# Altium PCB MAKO_pH_sensor_PCB.PcbDoc
Units mm, origin at the board's own origin, x right, y up, seen from the top; angles counter-clockwise.
Board outline 95.5 x 79.5 mm, 2 copper layers (Top Layer, Bottom Layer); 74 components, 53 nets, 199 pads, 175 vias.
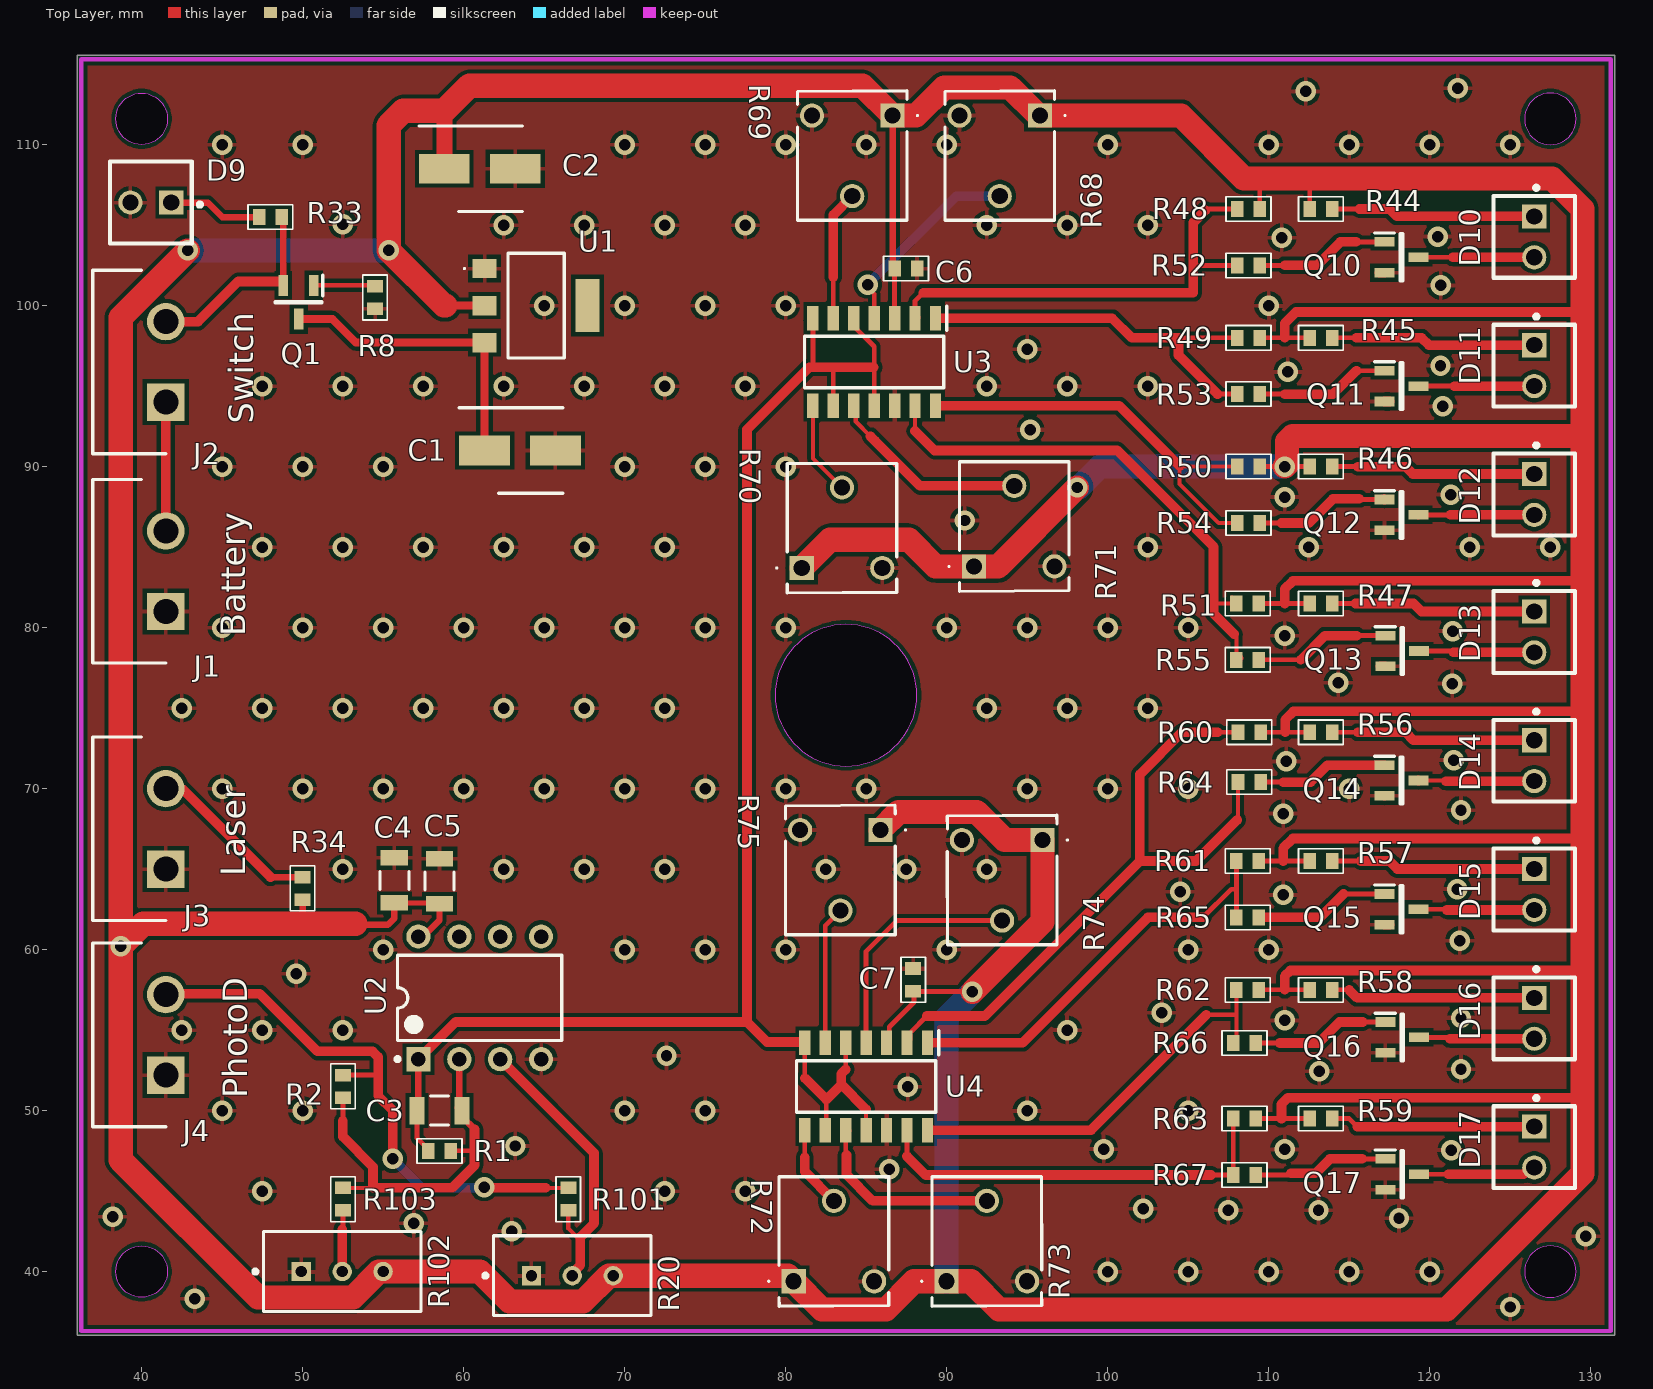
[diagram p0: Top Layer view]
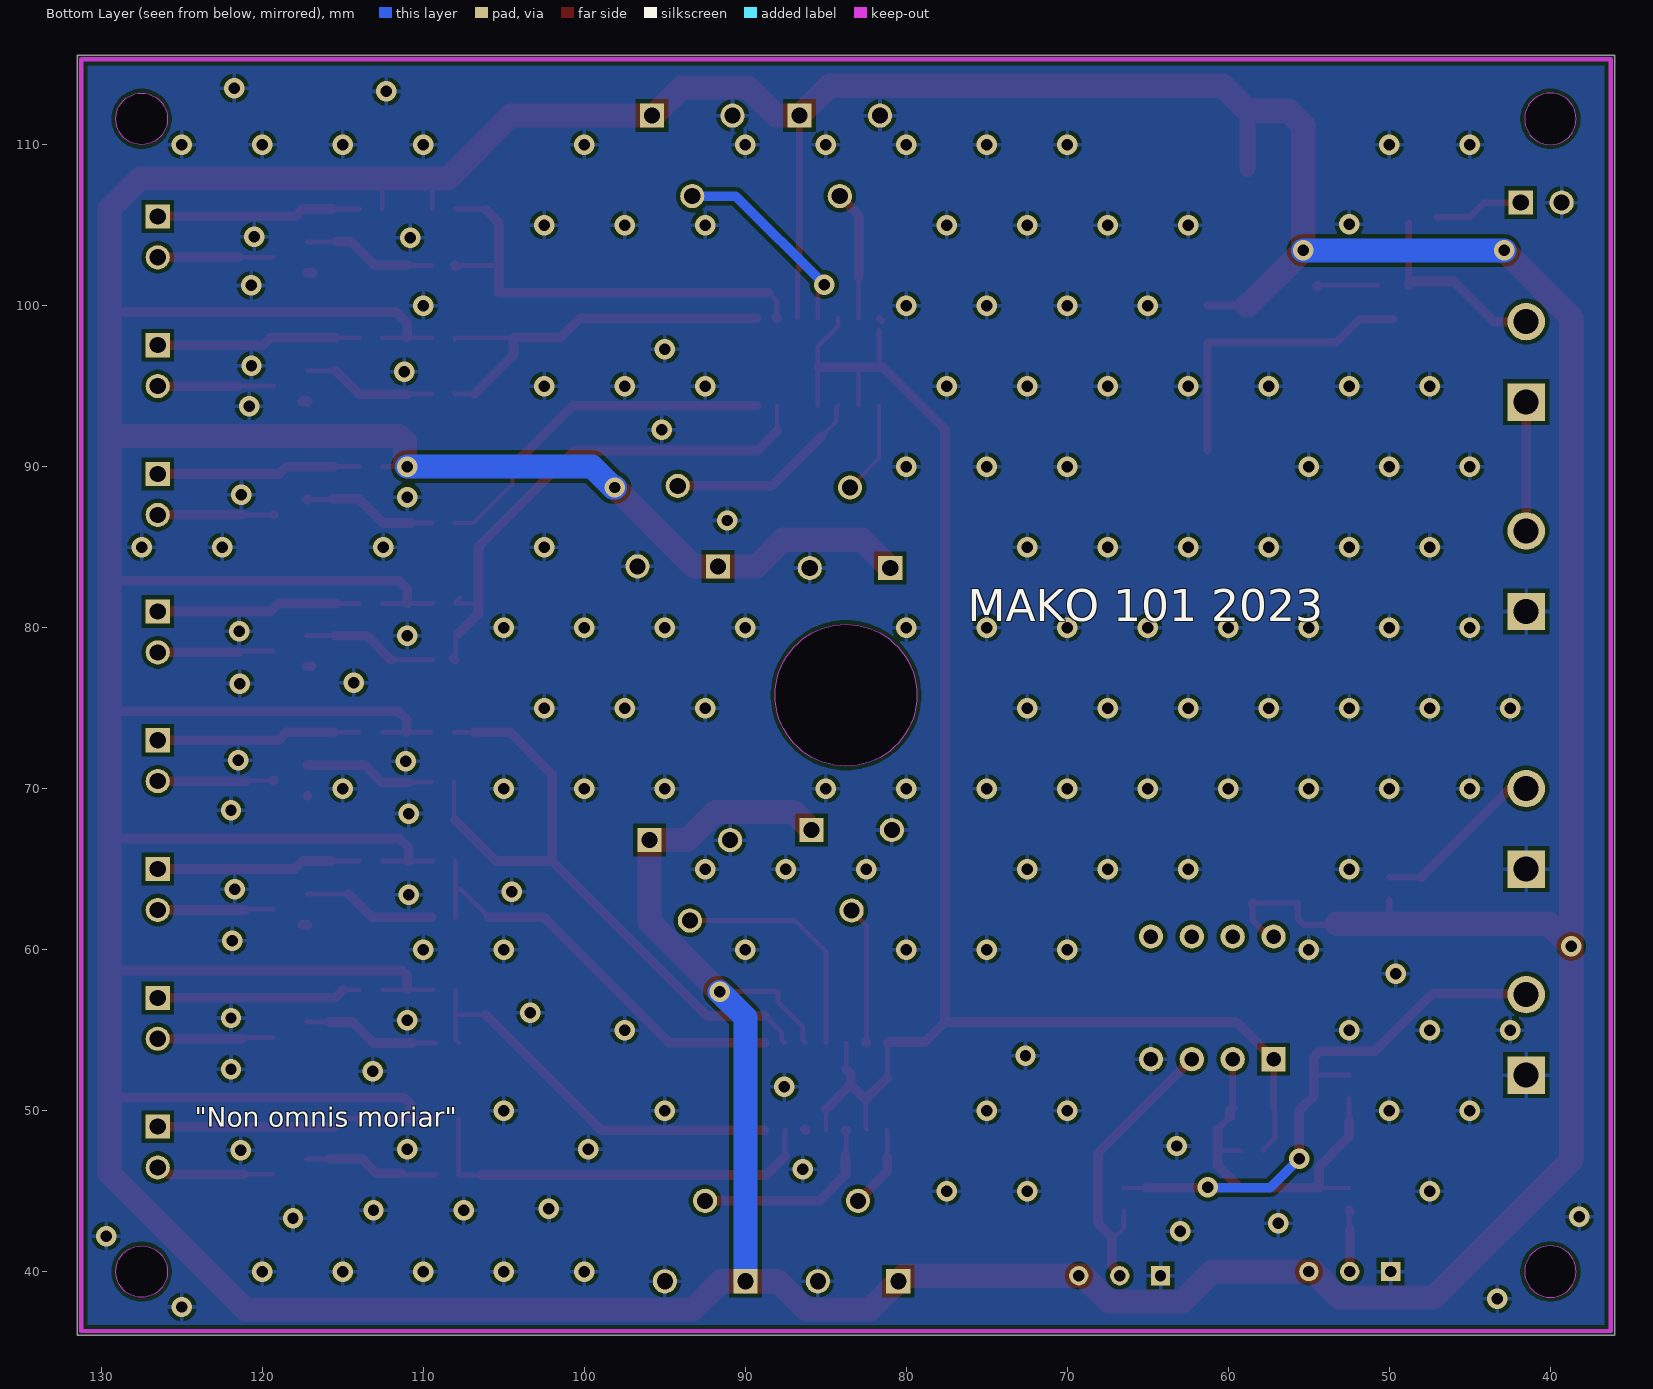
[diagram p1: Bottom Layer view, seen from below]

## Layer stack, top to bottom
Top Solder: solder mask 0.0102, Solder Resist, Dk 3.5
Top Layer: signal copper 0.0356
Dielectric 1: dielectric 0.32, FR-4, Dk 4.8
Bottom Layer: signal copper 0.0356
Bottom Solder: solder mask 0.0102, Solder Resist, Dk 3.5

## Board outline
36,36.05 36,115.55 131.5,115.55 131.5,36.05
cut-out: 125.9,40 ccw(c127.5,40) 127.5,38.4 ccw(c127.5,40) 129.1,40 ccw(c127.5,40) 127.5,41.6 ccw(c127.5,40)
cut-out: 125.9,111.6 ccw(c127.5,111.6) 127.5,110 ccw(c127.5,111.6) 129.1,111.6 ccw(c127.5,111.6) 127.5,113.2 ccw(c127.5,111.6)
cut-out: 79.35,75.8 ccw(c83.75,75.8) 83.75,71.4 ccw(c83.75,75.8) 88.15,75.8 ccw(c83.75,75.8) 83.75,80.2 ccw(c83.75,75.8)
cut-out: 40,38.4 cw(c40,40) 38.4,40 cw(c40,40) 40,41.6 cw(c40,40) 41.6,40 cw(c40,40)
cut-out: 40,110 cw(c40,111.6) 38.4,111.6 cw(c40,111.6) 40,113.2 cw(c40,111.6) 41.6,111.6 cw(c40,111.6)

## Design rules (kind name [scope] priority, off if disabled: settings)
Clearance [All] p1: gap=0.254 ignorepadtopadclearanceinfootprint=FALSE except(0: Arc-Hole Track-Hole SMDPad-Hole THPad-Hole Via-Hole Fill-Hole Poly-Hole Region-Hole Text-Hole)
HoleSize [All] p1: absolutevalues=TRUE maxlimit=2.54 minlimit=0.35 maxpercent=80.000 minpercent=20.000
MinimumAnnularRing [All] p1: minimumring=0.2
PolygonConnect [All] p1: connectstyle=Relief reliefconductorwidth=0.254 reliefentries=4 polygonreliefangle="90 Angle" airgapwidth=0.254
RoutingVias [All] p1: holewidth=0.711 width=1.27 viastyle="Through Hole" minholewidth=0.711 minwidth=1.27 maxholewidth=0.711 maxwidth=1.27
SilkToSilkClearance [All] p1: silktosilkclearance=0.1
SilkToSolderMaskClearance [IsPad] p1: minsilkscreentomaskgap=0.1 clearancetoexposedcopper=TRUE
SolderMaskExpansion [All] p1: expansion=0.102 istentingtop=FALSE
Width [All] p1: maxlimit=1.5 minlimit=0.254 preferedwidth=0.254 minimp=50.000000 maximp=50.000000 favimp=50.000000
27 further rules are at their usual default settings.

## Components (designator, comment, footprint, x,y, rotation, side; value= is the part's Value field where it differs from the comment)
C1 "=Value" CAPAE530X610N 63.5,91 r0 top
C2 "=Value" CAPAE530X610N 61,108.5 r0 top
C3 "C1206C102KGRACTU" FP-C1206C-EF-MFG 58.5,50 r180 top
C4 "C1206C104M5RACTU" FP-C1206C-EB-MFG 55.7,64.3 r90 top value="0.10 μF"
C5 "C1206C104M5RACTU" FP-C1206C-EB-MFG 58.5,64.25 r90 top value="0.10 μF"
C6 "=Value" CAPC1608X90N 87.475,102.3 r180 top
C7 "=Value" CAPC1608X90N 87.925,58.125 r270 top
D9 "=Value" 151033RS03000 41.84,106.4 r180 top
D10 "=Value" 151033RS03000 126.5,105.54 r270 top
D11 "=Value" 151033RS03000 126.5,97.54 r270 top
D12 "=Value" 151033RS03000 126.5,89.54 r270 top
D13 "=Value" 151033RS03000 126.5,81 r270 top
D14 "=Value" 151033RS03000 126.5,73 r270 top
D15 "=Value" 151033RS03000 126.5,65 r270 top
D16 "=Value" 151033RS03000 126.5,57 r270 top
D17 "=Value" 151033RS03000 126.5,49 r270 top
J1 "691101710002" RHDRRA2W95P0X500_1X2_1120X900X1280P 41.5,81 r90 top
J2 "691101710002" RHDRRA2W95P0X500_1X2_1120X900X1280P 41.5,94 r90 top
J3 "691101710002" RHDRRA2W95P0X500_1X2_1120X900X1280P 41.5,65 r90 top
J4 "691101710002" RHDRRA2W95P0X500_1X2_1120X900X1280P 41.5,52.2 r90 top
Q1 "IRLML6402TRPBF" SOT95P237X112-3N 49.75,100.209 r270 top
Q10 "BC847BLT1G" SOT96P237X111-3N 118.25,103 r0 top
Q11 "BC847BLT1G" SOT96P237X111-3N 118.25,95 r0 top
Q12 "BC847BLT1G" SOT96P237X111-3N 118.25,87 r0 top
Q13 "BC847BLT1G" SOT96P237X111-3N 118.3,78.545 r0 top
Q14 "BC847BLT1G" SOT96P237X111-3N 118.25,70.5 r0 top
Q15 "BC847BLT1G" SOT96P237X111-3N 118.25,62.5 r0 top
Q16 "BC847BLT1G" SOT96P237X111-3N 118.3,54.545 r0 top
Q17 "BC847BLT1G" SOT96P237X111-3N 118.3,46.045 r0 top
R1 "*" CAPC1608X90N 58.5,47.5 r180 top
R2 "0" CAPC1608X90N 52.5,51.5 r270 top
R8 "*" CAPC1608X90N 54.5,100.5 r90 top
R20 "3296W-1-103LF" FP-3296W-MFG 66.75,39.75 r270 top
R33 "*" CAPC1608X90N 48,105.5 r180 top
R34 "*" CAPC1608X90N 50,63.8 r90 top
R44 "*" CAPC1608X90N 113.25,106 r0 top
R45 "*" CAPC1608X90N 113.25,98 r0 top
R46 "*" CAPC1608X90N 113.25,90 r0 top
R47 "*" CAPC1608X90N 113.25,81.5 r0 top
R48 "*" CAPC1608X90N 108.75,106 r180 top
R49 "*" CAPC1608X90N 108.75,98 r180 top
R50 "*" CAPC1608X90N 108.75,90 r180 top
R51 "*" CAPC1608X90N 108.7,81.5 r180 top
R52 "*" CAPC1608X90N 108.75,102.5 r180 top
R53 "*" CAPC1608X90N 108.75,94.5 r180 top
R54 "*" CAPC1608X90N 108.75,86.5 r180 top
R55 "*" CAPC1608X90N 108.7,78 r180 top
R56 "*" CAPC1608X90N 113.25,73.5 r0 top
R57 "*" CAPC1608X90N 113.25,65.5 r0 top
R58 "*" CAPC1608X90N 113.25,57.5 r0 top
R59 "*" CAPC1608X90N 113.25,49.5 r0 top
R60 "*" CAPC1608X90N 108.8,73.5 r180 top
R61 "*" CAPC1608X90N 108.7,65.5 r180 top
R62 "*" CAPC1608X90N 108.7,57.5 r180 top
R63 "*" CAPC1608X90N 108.5,49.5 r180 top
R64 "*" CAPC1608X90N 108.8,70.4 r180 top
R65 "*" CAPC1608X90N 108.7,62 r180 top
R66 "*" CAPC1608X90N 108.5,54.2 r180 top
R67 "*" CAPC1608X90N 108.5,46 r180 top
R68 "WH06-2B-10K" 3306F1503 95.8,111.8 r180 top
R69 "WH06-2B-10K" 3306F1503 86.636,111.8 r180 top
R70 "WH06-2B-10K" 3306F1503 81,83.7 r0 top
R71 "WH06-2B-10K" 3306F1503 91.7,83.8 r0 top
R72 "WH06-2B-10K" 3306F1503 80.5,39.396 r0 top
R73 "WH06-2B-10K" 3306F1503 90,39.396 r0 top
R74 "WH06-2B-10K" 3306F1503 95.946,66.8 r180 top
R75 "WH06-2B-10K" 3306F1503 85.9,67.426 r180 top
R101 "DNP" CAPC1608X90N 66.5,44.5 r270 top
R102 "DNP" FP-3296W-MFG 52.46,40.005 r270 top
R103 "DNP" CAPC1608X90N 52.5,44.5 r270 top
U1 "AMS1117-5.0" S402TS1RP 64.5,100 r270 top
U2 "TL072CP" P0008A 61,57 r90 top
U3 "LM2901DT" SOIC127P600X175-14N 85.5,96.5 r270 top
U4 "LM2901DT" SOIC127P600X175-14N 85,51.5 r270 top

## Footprints (in the part's own frame and the unit in brackets; to place one, negate y for a bottom-side part, rotate by r counter-clockwise, add the part's x,y. Pads: shape width x height; smd on the part's side, far side on the other; paste and mask are expansions set on the pad)
3306F1503 [mm]
  rect 1.5x1.5 hole 1: 1(0,0)
  round 1.5 hole 1: 2(2.5,5) 3(5,0)
  silkscreen extent -1.6,-1.55 5.9,6.5
151033RS03000 [mm]
  rect 1.5x1.5 hole 1: 1(0,0)
  round 1.5 hole 1: 2(2.54,0)
  silkscreen extent -1.91,-2.54 3.81,2.54
CAPAE530X610N [mm]
  rect 3.15x1.85 smd: 1(-2.2,0) 2(2.2,0)
  silkscreen extent -3.77,-2.65 2.65,2.65
CAPC1608X90N [mm]
  rect 0.78x0.99 smd: 1(-0.7,0) 2(0.7,0)
  silkscreen extent -1.4,-0.76 1.4,0.76
FP-3296W-MFG [mm]
  rect 1.2x1.2 hole 0.7 paste-2539.97 mask+0: 1(0.005,-2.54)
  round 1.2 hole 0.7 paste-2539.97 mask+0: 2(0.005,0) 3(0.005,2.54)
  silkscreen extent -2.48,-5.52 2.48,4.89, body extent -2.58,-4.99 2.58,4.99, height 0.25
FP-C1206C-EB-MFG [mm]
  rect 0.95x1.7 smd paste+0 mask+0: 1(-1.4,0) 2(1.4,0)
  silkscreen extent -0.55,-0.9 0.55,0.9, body extent -2,-1 2,1, height 0.25
FP-C1206C-EF-MFG [mm]
  rect 0.95x1.7 smd paste+0 mask+0: 1(-1.4,0) 2(1.4,0)
  silkscreen extent -0.55,-0.9 0.55,0.9, body extent -2,-1 2,1, height 0.25
P0008A [mm] "DIP, 8-Leads, Body 10.15x6.6mm, Pitch 2.54mm"
  rect 1.5x1.5 hole 0.9: 1(-3.81,3.81)
  round 1.5 hole 0.9: 2(-3.81,1.27) 3(-3.81,-1.27) 4(-3.81,-3.81) 5(3.81,-3.81) 6(3.81,-1.27) 7(3.81,1.27) 8(3.81,3.81)
  silkscreen extent -3.93,-5.1 2.65,5.23, body extent -3.95,-5.07 3.95,5.07, height 5.08
RHDRRA2W95P0X500_1X2_1120X900X1280P [mm]
  rect 2.325x2.325 / inner round 2.325 / far side rect 2.325x2.325 hole 1.55: 1(0,0)
  round 2.325 hole 1.55: 2(5,0)
  silkscreen extent -3.2,0 8.2,4.54
S402TS1RP [mm]
  rect 1.2x1.5 smd: 1(-2.3,-3.2) 2(0,-3.2) 3(2.3,-3.2)
  rect 3.3x1.5 smd: 4(0,3.2)
  silkscreen extent -3.25,-4.5 3.25,1.75
SOIC127P600X175-14N [mm]
  rect 1.525x0.7 smd: 1(-2.712,3.81) 2(-2.712,2.54) 3(-2.712,1.27) 4(-2.712,0) 5(-2.712,-1.27) 6(-2.712,-2.54) 7(-2.712,-3.81) 8(2.712,-3.81) 9(2.712,-2.54) 10(2.712,-1.27) 11(2.712,0) 12(2.712,1.27) 13(2.712,2.54) 14(2.712,3.81)
  silkscreen extent -3.47,-4.33 1.6,4.51
SOT95P237X112-3N [mm]
  rect 1.3x0.6 smd: 1(-1.05,0.95) 2(-1.05,-0.95) 3(1.05,0)
  silkscreen extent -1.7,-1.46 0.05,1.5
SOT96P237X111-3N [mm]
  rect 1.25x0.6 smd: 1(-1.05,0.955) 2(-1.05,-0.955) 3(1.05,0)
  silkscreen extent -1.68,-1.46 0.08,1.51

## Part data
C1 C2: library part CapPol, "Ceramic capacitor"
C3: library part CMP-03020-034681-1, "CAP CER 1000PF 2KV X7R 1206", Capacitance=1nF, Case Code (Imperial)=1206, Case Code (Metric)=3216, Dielectric=X7R, Dielectric Material=Ceramic, Max Operating Temperature=125°C, Min Operating Temperature=-55°C, Package Quantity=1, Tolerance=10%, Voltage=2kV, Voltage Rating (DC)=2.5kV, Case/Package=1206, Construction=Flat, Depth=1.6mm, Dissipation Factor=2.5%, Height=1.6mm, Length=3.2mm, Mount="Surface Mount", Number of Pins=2, Packaging="Tape and Reel", Radiation Hardening=No, REACH SVHC="No SVHC", RoHS Compliant=Yes, Series=C, Termination=SMD/SMT, Thickness=0.069inch, Voltage Rating=2kV, Width=0.063inch
C4 C5: library part CMP-03020-028488-1, "CAP CER 0.1UF 50V X7R 1206", Capacitance="0.10 μF", Manufacturer=KEMET, Package=C1206C-EB, Temperature="-55°C to +150°C", Temperature Characteristic=X7R, Temperature Coefficient=15%, Temperature Range High=+150°C, Temperature Range Low=-55°C, Tolerance=0.2, Voltage Rating="50 V", Automotive=Yes, Automotive Grade="Grade 0", Category=Cap, ComponentLink2Description=Datasheet, ComponentLink2URL=https://content.kemet.com/datasheets/KEM_C1007_X8R_ULTRA_150C_SMD.pdf, Device Class L1="Passive Components", Device Class L2=Capacitors, Device Class L3="Ceramic Capacitors", Digikey Description="CAP CER 0.1UF 50V X7R 1206", Height=0.88mm, Ipc Land Pattern Name=CAPC320160X78, Lead Free=Yes, Manufacturer Part Number=C1206C104M5RACTU, Material=Ceramic, Mouser Description="Multilayer Ceramic Capacitors MLCC - SMD/SMT 50volts 0.1uF X7R 20%", Octopart=https://octopart.com/c1206c104m5ractu-kemet-129344, RoHS=TRUE
C6 C7: library part Cap, "Ceramic capacitor"
D9 D10 D11 D12 D13 D14 D15 D16 D17: library part LED
J1 J2 J3 J4: "WR-TBL Series 101 Horizontal Entry Modular, THT, pitch 5mm, 2p", Manufacturer="Wurth Elektronik", Operating Temperature Max=105°C, Operating Temperature Min=-40°C, Rated Current=16A, Working Voltage=250V, Application="Pressure Clamp", Category="Terminal Blocks", ComponentLink1Description="Website Link", ComponentLink1URL=https://www.we-online.com/redexpert/article/691101710002?ad, ComponentLink2Description="Datasheet Link", ComponentLink2URL=https://www.we-online.com/redexpert/spec/691101710002?ad, Manufacturer Part Number=691101710002, Match Code=WR-TBL, Modularity=Yes, Mount="Through Hole", Number of Pins=2, Number of Rows=1, Orientation=Horizontal, Packaging=Box, Pitch=5mm
Q1: library part PMOSFET
Q10 Q11 Q12 Q13 Q14 Q15 Q16 Q17: "Transistor NPN 45V 100mA hfe200 SOT23 ON Semi BC847BLT1G NPN Bipolar Transistor, 0.1 A, 45 V, 3-Pin SOT-23", Manufacturer_Name=onsemi, Mouser Part Number=863-BC847BLT1G, Datasheet Link=http://www.onsemi.com/pub/Collateral/BC846ALT1-D.PDF, Geometry.Height=1.11mm, Manufacturer_Part_Number=BC847BLT1G, Mouser Price/Stock=https://www.mouser.co.uk/ProductDetail/onsemi/BC847BLT1G?qs=vNc2DXHODiLAH81QlkcRzw%3D%3D
R1 R2 R8 R33 R34 R44 R45 R46 R47 R48 R49 R50 R51 R52 R53 R54 R55 R56 R57 R58 R59 R60 R61 R62 R63 R64 R65 R66 R67 R101 R103: library part RES, "Resistor"
R20 R102: library part CMP-1747-00001-8, "TRIMMER 10K OHM 0.5W PC PIN TOP / 3296W-1-103LF", Color=Blue, Insulation Resistance=1GR, Max Operating Temperature=125°C, Max Power Dissipation=500mW, Min Operating Temperature=-55°C, Package Quantity=50, Resistance=10kR, Resistance Tolerance=10%, Resistor Type=Cermet, Temperature Coefficient=100ppm/°C, Contact Plating=Tin, Depth=4.83mm, Height=11.55mm, Lead Free="Lead Free", Length=9.53mm, Military Standard=Not, Mount="Through Hole", Number of Turns=25, Packaging=Rail/Tube, Power Rating=500mW, Radiation Hardening=No, Reach SVHC Compliant=Yes, RoHS Compliant=Yes, Series=3296, Taper=Linear, Technology=CERMET, Termination=Pin, Tolerance=10%, Weight=0.03oz, Width=9.53mm
R68 R69 R70 R71 R72 R73 R74 R75: library part 3306F-1-103, "10 kOhms 0.2W, 1/5W PC Pins Through Hole Trimmer Potentiometer Cermet 1 Turn Top Adjustment", Package="6432 Bourns", Availability=Unavailable, MF=Bourns, MP=3306F-1-103, Price=None, SnapEDA_Link=https://www.snapeda.com/parts/3306F-1-103/Bourns/view-part/293813/?ref=snap
U1: "1A LOW DROPOUT VOLTAGE REGULATOR", Package="SOT-223 Seeed Technology", Availability="Not in stock", Check_prices=https://www.snapeda.com/parts/AMS1117-5.0/ams/view-part/?ref=eda, MF=ams, MP=AMS1117-5.0, Price=None, SnapEDA_Link=https://www.snapeda.com/parts/AMS1117-5.0/ams/view-part/?ref=snap
U2: library part CMP-0017-00950-2, "Dual Low-Noise JFET-Input General-Purpose Operational Amplifier, 7 to 36 V, 0 to 70 degC, 8-pin DIP (P8), Pb-Free (RoHS)", Manufacturer="Texas Instruments", Rating=Catalog, Total Supply Voltage(Max)(+5V is 5, +/-5V is 10)=36, Total Supply Voltage(Min)(+5V is 5, +/-5V is 10)=7, CMRR(Min)(dB)=70, Code_JEDEC=MS-001, ComponentLink1Description="Manufacturer URL", ComponentLink1URL=http://www.ti.com/, ComponentLink2Description=Datasheet, ComponentLink2URL=http://www.ti.com/lit/ds/symlink/tl072.pdf, ComponentLink3Description="Package Specification", ComponentLink3URL=http://www.ti.com/litv/pdf/mpdi001b, DatasheetVersion=SLOS080J, Eco-Plan="Pb-Free (RoHS)", GBW(Typ)(MHz)=3, IIB(Max)(pA)=200, Iq per channel(Max)(mA)=2.5, Mounting Technology="Through Hole", Number of Channels=2, Offset Drift(Typ)(uV/C)=18, PackageDescription="8-Pin Plastic In-Line, Body 9.59 x 6.35 mm, Pitch 2.54 mm", PackageReference=P0008A, PackageVersion="4040082/E, 04/2010", PartNumber=TL072CP, Slew Rate(Typ)(V/us)=13, Sub Family="General Purpose Amplifier, High Supply Voltage Amplifier (>=30V)", Vio (25C)(Max)(mV)=10, Vn at 1kHz(Typ)(nV/rtHz)=18
U3 U4: "LM2901DT, Quad Comparator Open Collector 1.3us 12 V, 15 V, 18 V, 24 V, 28 V, 3 V, 5 V, 9 V 14-Pin SO", Manufacturer_Name=STMicroelectronics, Mouser Part Number=511-LM2901DT, Datasheet Link=http://www.st.com/st-web-ui/static/active/en/resource/technical/document/datasheet/CD00000532.pdf, Geometry.Height=1.75mm, Manufacturer_Part_Number=LM2901DT, Mouser Price/Stock=https://www.mouser.co.uk/ProductDetail/STMicroelectronics/LM2901DT?qs=dKKAVK9nnHN1RlpYJ88XIQ%3D%3D

## Via types
v1: diameter 1.27, hole 0.711, Top Layer to Bottom Layer, 175 vias

## Nets (pads, with @x,y where several pads share a name; then routed paths per layer and width w, separated by ;. In a path a pad name is that pad's centre, name@x,y a point inside that pad or via, vN(x,y) a via of type N, cw(c..) or ccw(c..) an arc to the next point about the centre after c; other vN are vias at no path point)
+5V: C2.1 C4.1 C5.1 C6.2 C7.2 R20.3 R34.1 R44.1 R45.1 R46.1 R47.1 R48.1 R49.1 R50.1 R51.1 R56.1 R57.1 R58.1 R59.1 R60.1 R61.1 R62.1 R63.1 R68.1 R69.1 R70.1 R71.1 R72.1 R73.1 R74.1 R75.1 R102.3 U1.2 U2.8 U3.3 U4.3 | length 616.3
  Top Layer w0.254: 53.275,61.6 53.325,61.55 ; C7.2@87.975,57.375 C7.2@88,57.4 ; 109.45,107.85 109.5,107.9 ; 112.5,107.9 112.55,107.85
  Top Layer w0.3: C4.1 C5.1@58.45,62.9 ; U4.3 86.44,54.382 86.44,55.19 87.975,56.725 C7.2@87.975,57.375 ; U3.3 C6.2@86.77,102.2 ; C7.2@88,57.4 v1@91.575,57.4 ; R63.1 110.8,49.5 R59.1 ; R62.1 111,57.5 R58.1 ; R61.1 110.9,65.5 R57.1 ; R51.1 111,81.5 R47.1 ; R50.1 v1(111,90) R46.1 ; R49.1 111,98 R45.1 ; R48.1 109.45,107.85 ; R60.1 111.025,73.5 R56.1 ; R44.1 112.55,107.85
  Top Layer w0.4: 50,61.6 R34.1 ; 53.325,61.55 55.3,61.55 55.7,61.95 C4.1 ; U2.8@57.485,60.81 57.488,60.81 58.5,61.822 C5.1 ; C6.2@86.664,102.3 R69.1@86.664,111.771
  Top Layer w0.5: U2.8 U2.8@57.461,60.81 ; 58.879,100 U1.2
  Top Layer w0.6: C5.1@58.45,62.9 C5.1 ; R69.1 R69.1@86.664,111.771 ; v1@91.575,57.4 v1(91.6,57.375) ; 110.8,49.5 110.8,50.4 111.2,50.8 129.5,50.8 ; 110.9,65.5 110.9,66.3 111.5,66.9 129.3,66.9 129.5,66.7 ; 111,57.5 111,58.349 111.351,58.7 129.4,58.7 129.5,58.8 ; 111,81.5 111,82.4 111.5,82.9 129.3,82.9 129.5,82.7 ; 111,98 111,98.9 111.7,99.6 129.2,99.6 129.5,99.3 ; 111.025,73.5 111.025,74.275 111.55,74.8 129.5,74.8
  Top Layer w1: C2.1 58.8,112.1
  Top Layer w1.5: v1(42.861,103.425) 38.7,99.264 v1(38.7,60.2) ; 53.275,61.6 50,61.6 40.1,61.6 v1(38.7,60.2) ; 58.879,100 58.775,100 v1(55.35,103.425) 55.35,111.196 56.254,112.1 58.8,112.1 60.354,113.654 84.782,113.654 R69.1 88.1,111.8 89.854,113.554 93.946,113.554 95.7,111.8 R68.1 104.555,111.8 108.455,107.9 109.5,107.9 112.5,107.9 127.6,107.9 129.5,106 129.5,99.3 129.5,91.9 ; R70.1 82.754,85.454 87.66,85.454 89.314,83.8 R71.1 93.2,83.8 v1(98.1,88.7) ; R75.1 87.028,68.554 91.86,68.554 93.614,66.8 R74.1@95.6,66.8 ; v1(91.6,57.375) 95.946,61.721 R74.1 ; v1(111,90) 111.149,90.149 111.149,91.549 111.5,91.9 129.5,91.9 ; v1(38.7,60.2) 38.7,46.92 47.22,38.4 48.9,38.4 48.904,38.396 53.124,38.396 54.728,40 R102.3 61,40 62.859,38.141 67.414,38.141 69.018,39.745 R20.3 80.151,39.745 R72.1 82.254,37.642 86.227,37.642 87.981,39.396 R73.1 91.504,39.396 93.258,37.642 121.042,37.642 129.5,46.1 129.5,50.8 129.5,58.8 129.5,66.7 129.5,74.8 129.5,82.7 129.5,91.9
  Bottom Layer w0.6: R69.1@86.5,111.9 R69.1@86.772,111.628
  Bottom Layer w1.5: v1(42.861,103.425) v1(55.35,103.425) ; R73.1 90,55.775 v1(91.6,57.375) ; v1(98.1,88.7) 98.219,88.7 99.519,90 v1(111,90)
GND: C1.2 C2.2 C4.2 C5.2 C6.1 C7.1 D9.2 J1.1 J3.1 J4.1 Q10.2 Q11.2 Q12.2 Q13.2 Q14.2 Q15.2 Q16.2 Q17.2 R8.1 R20.1 R68.3 R69.3 R70.3 R71.3 R72.3 R73.3 R74.3 R75.3 R102.1 U1.1 U2.4 U3.12 U4.12 | length 1.4
  Top Layer w0.6: R102.1@49.91,40.01 R102.1 ; U4.12 U4.12@86.32,48.838 ; Q10.2@116.875,102.045 Q10.2 ; Q13.2@116.925,77.59 Q13.2 ; Q15.2 Q15.2@117.525,61.545 ; Q11.2 Q11.2@117.525,94.045
  other v1: 125,37.8 43.3,38.3 100,40 105,40 110,40 115,40 120,40 129.7,42.2 63,42.5 56.9,43 118.1,43.3 38.2,43.4 107.5,43.8 113.1,43.8 102.2,43.9 47.5,45 72.5,45 77.5,45 86.425,46.35 121.35,47.525 99.75,47.6 111,47.6 63.2,47.8 45,50 50,50 70,50 75,50 95,50 105,50 87.575,51.475 113.15,52.45 121.95,52.575 72.6,53.4 42.5,55 47.5,55 52.5,55 97.5,55 111,55.6 121.95,55.75 103.35,56.075 49.6,58.5 55,60 70,60 75,60 80,60 90,60 105,60 110,60 121.875,60.55 110.9,63.4 104.5,63.6 121.725,63.75 52.5,65 62.5,65 67.5,65 72.5,65 82.5,65 87.5,65 92.5,65 110.9,68.45 121.95,68.65 45,70 50,70 55,70 60,70 65,70 70,70 75,70 80,70 85,70 95,70 100,70 105,70 115,70 111.1,71.7 121.5,71.75 42.5,75 47.5,75 52.5,75 57.5,75 62.5,75 67.5,75 72.5,75 92.5,75 97.5,75 102.5,75 121.4,76.525 114.325,76.575 111,79.5 121.45,79.775 45,80 50,80 55,80 60,80 65,80 70,80 75,80 80,80 90,80 95,80 100,80 105,80 47.5,85 52.5,85 57.5,85 62.5,85 67.5,85 72.5,85 102.5,85 112.5,85 122.5,85 127.5,85 91.125,86.65 111,88.1 121.3,88.25 45,90 50,90 55,90 70,90 75,90 80,90 95.2,92.3 120.825,93.75 47.5,95 52.5,95 57.5,95 62.5,95 67.5,95 72.5,95 77.5,95 92.5,95 97.5,95 102.5,95 111.2,95.9 120.675,96.275 95,97.3 65,100 70,100 75,100 80,100 110,100 120.7,101.25 110.825,104.225 120.5,104.275 62.5,105 67.5,105 72.5,105 77.5,105 92.5,105 97.5,105 102.5,105 52.5,105.064 45,110 50,110 70,110 75,110 80,110 85,110 90,110 100,110 110,110 115,110 120,110 125,110 112.3,113.3 121.75,113.5
NetC1_1: C1.1 Q1.3 U1.3 | length 18.9
  Top Layer w0.5: Q1.3 51.841,99.159 53.3,97.7 U1.3 C1.1
NetC3_1: C3.1 R1.1 R2.2 R103.1 U2.2 | length 23.6
  Top Layer w0.254: R103.1 54.375,45.2 ; 60.65,47.5 60.675,47.475
  Top Layer w0.3: 52.5,49.375 R2.2 ; R1.1 60.65,47.5
  Top Layer w0.4: C3.1@59.73,50.17 U2.2 ; C3.1@59.9,49.625 60.675,48.85
  Top Layer w0.6: 52.5,49.375 52.5,48.375 54.375,46.5 54.375,45.2 59.275,45.2 60.675,46.6 60.675,47.475 60.675,48.85 ; C3.1@59.73,50.17 C3.1 C3.1@59.9,49.625
NetC3_2: C3.2 R1.2 U2.1 U3.5 U3.7 U3.9 U3.11 U4.5 U4.7 U4.9 U4.11 | length 101.9
  Top Layer w0.254: R1.2 R1.2@57.8,47.605 ; U4.9 U4.9@82.525,48.853 ; 82.96,96.11 83.025,96.175 ; U4.11 85,50.08
  Top Layer w0.3: C3.2 57.1,48.305 R1.2@57.8,47.605 ; 81.19,52.01 U4.7 ; 81.7,96.175 U3.7@81.7,98.46 ; U4.9@82.525,48.853 82.525,50.675 ; U3.9 82.96,96.11 ; 83.73,52.555 U4.5 ; U3.5 84.23,98.727 85.5,97.457 85.5,96.2 85.5,95.475 U3.11
  Top Layer w0.4: C3.2@57.19,50.19 U2.1 ; U3.7@81.54,99.062 U3.7
  Top Layer w0.6: U2.1 59.5,55.5 77.6,55.5 ; 81.19,52.01 82.525,50.675 83.465,51.615 ; U4.7 81.184,54.212 81.14,54.256 78.844,54.256 77.6,55.5 ; 83.73,52.555 83.465,52.29 83.465,51.615 ; 85,50.08 83.465,51.615 ; 85.475,96.175 83.025,96.175 81.7,96.175 81.475,96.175 77.6,92.3 77.6,55.5
NetD9_1: D9.1 R33.2 | length 5.6
  Top Layer w0.4: D9.1 44.1,106.4 45,105.5 R33.2@47.05,105.5
NetD10_1: D10.1 R44.2 | length 12.7
  Top Layer w0.3: R44.2 115.65,106
  Top Layer w0.6: 115.65,106 117.5,106 117.96,105.54 D10.1
NetD10_2: D10.2 Q10.3 | length 7.2
  Top Layer w0.3: Q10.3 121.45,103
  Top Layer w0.6: 121.45,103 D10.2
NetD11_1: D11.1 R45.2 | length 12.7
  Top Layer w0.3: R45.2 115.45,98
  Top Layer w0.6: 115.45,98 119.5,98 119.96,97.54 D11.1
NetD11_2: D11.2 Q11.3 | length 7.2
  Top Layer w0.3: Q11.3 121.525,95
  Top Layer w0.6: 121.525,95 D11.2
NetD12_1: D12.1 R46.2 | length 12.7
  Top Layer w0.3: R46.2 115.55,90
  Top Layer w0.6: 115.55,90 118.5,90 118.96,89.54 D12.1
NetD12_2: D12.2 Q12.3 | length 7.2
  Top Layer w0.3: Q12.3 121.275,87
  Top Layer w0.6: 121.275,87 D12.2
NetD13_1: D13.1 R47.2 | length 12.8
  Top Layer w0.3: R47.2 115.4,81.5
  Top Layer w0.6: 115.4,81.5 119,81.5 119.5,81 D13.1
NetD13_2: D13.2 Q13.3 | length 7.2
  Top Layer w0.254: 121.38,78.545 121.465,78.46
  Top Layer w0.3: Q13.3 121.38,78.545
  Top Layer w0.6: 121.465,78.46 D13.2 D13.2@126.458,78.502
NetD14_1: D14.1 R56.2 | length 12.8
  Top Layer w0.254: R56.2 115.55,73.5
  Top Layer w0.6: 115.55,73.5 118.5,73.5 119,73 D14.1
NetD14_2: D14.2 Q14.3 | length 7.3
  Top Layer w0.254: Q14.3 120.975,70.5 121.015,70.46
  Top Layer w0.6: Q14.3 Q14.3@119.32,70.48 ; 121.015,70.46 D14.2 D14.2@126.48,70.48
NetD15_1: D15.1 R57.2 | length 12.8
  Top Layer w0.3: R57.2 115.725,65.5
  Top Layer w0.6: 115.725,65.5 117.5,65.5 118,65 D15.1
NetD15_2: D15.2 Q15.3 | length 7.2
  Top Layer w0.254: 121.025,62.5 121.065,62.46
  Top Layer w0.3: Q15.3 121.025,62.5
  Top Layer w0.6: 121.065,62.46 D15.2 D15.2@126.48,62.48
NetD16_1: D16.1 R58.2 | length 12.8
  Top Layer w0.3: R58.2 115,57.5
  Top Layer w0.6: 115,57.5 115.5,57 D16.1
NetD16_2: D16.2 Q16.3 | length 7.2
  Top Layer w0.254: 121.18,54.545 121.265,54.46
  Top Layer w0.3: Q16.3 121.18,54.545
  Top Layer w0.6: 121.265,54.46 D16.2 D16.2@126.457,54.503
NetD17_1: D17.1 R59.2 | length 12.9
  Top Layer w0.3: R59.2 115,49.5 115.5,49
  Top Layer w0.6: R59.2@113.95,49.395 R59.2 ; 115.5,49 116,49 D17.1
NetD17_2: D17.2 Q17.3 | length 7.3
  Top Layer w0.3: Q17.3 121.17,46.045
  Top Layer w0.6: 121.17,46.045 125.841,46.045 126.256,46.46 D17.2
NetJ1_2: J1.2 J2.1 | length 8
  Top Layer w0.6: J1.2 J2.1
NetJ2_2: J2.2 Q1.2 R33.1 | length 12.3
  Top Layer w0.4: Q1.2@48.8,101.327 R33.1@48.8,105.15
  Top Layer w0.6: J2.2 43.5,99 46,101.5 48.627,101.5 48.8,101.327 Q1.2
NetJ3_2: J3.2 R34.2 | length 10.8
  Top Layer w0.4: 48,64.5 R34.2
  Top Layer w0.6: J3.2 42.5,70 48,64.5
NetJ4_2: J4.2 R2.1 R101.1 | length 35.6
  Top Layer w0.254: 65.1,45.2 65.125,45.225 65.15,45.2 R101.1
  Top Layer w0.3: R2.1 54.687,52.2
  Top Layer w0.6: J4.2@41.349,57.25 47.345,57.25 50.92,53.675 54.336,53.675 54.688,53.324 54.688,52.2 54.688,50.913 55.6,50 v1(55.6,47) ; v1(61.275,45.25) 61.325,45.2 65.1,45.2
  Bottom Layer w0.6: v1(55.6,47) 57.4,45.2 61.225,45.2 v1(61.275,45.25)
NetQ1_1: Q1.1 R8.2 | length 3.8
  Top Layer w0.3: Q1.1 R8.2@54.441,101.259
  Top Layer w0.6: R8.2@54.441,101.259 R8.2
NetQ10_1: Q10.1 R52.1 | length 8.4
  Top Layer w0.3: R52.1 111,102.5 ; 115.45,103.955 Q10.1
  Top Layer w0.6: 111,102.5 113,102.5 114.455,103.955 115.45,103.955
NetQ11_1: Q11.1 R53.1 | length 8.4
  Top Layer w0.3: R53.1 111,94.5 ; 115.455,95.955 Q11.1
  Top Layer w0.6: 111,94.5 114,94.5 115.455,95.955
NetQ12_1: Q12.1 R54.1 | length 8.4
  Top Layer w0.3: R54.1 110.8,86.5 ; 115.67,87.955 Q12.1
  Top Layer w0.6: 110.8,86.5 112.5,86.5 114,88 115.625,88 ; Q12.1@117.155,88 Q12.1
NetQ13_1: Q13.1 R55.1 | length 8.5
  Top Layer w0.254: 115.5,79.525 115.525,79.5
  Top Layer w0.3: R55.1 112,78 ; 115.525,79.5 Q13.1
  Top Layer w0.6: 112,78 113.5,79.5 115.475,79.5
NetQ14_1: Q14.1 R64.1 | length 8.1
  Top Layer w0.3: R64.1 110.9,70.4
  Top Layer w0.6: 110.9,70.4 112.6,70.4 113.655,71.455 Q14.1
NetQ15_1: Q15.1 R65.1 | length 8.3
  Top Layer w0.3: 114.655,63.455 Q15.1
  Top Layer w0.6: R65.1@109.49,62 113.2,62 114.655,63.455
NetQ16_1: Q16.1 R66.1 | length 8.6
  Top Layer w0.3: R66.1 110.7,54.2 ; 115.85,55.5 Q16.1
  Top Layer w0.6: 110.7,54.2 113.1,54.2 114.4,55.5 115.85,55.5
NetQ17_1: Q17.1 R67.1 | length 8.3
  Top Layer w0.3: R67.1 111.275,46 ; 115.8,47 Q17.1
  Top Layer w0.6: 111.375,46.1 112.9,46.1 113.8,47 115.8,47
NetR20_2: R20.2 R101.2 U2.3 | length 18.5
  Top Layer w0.254: R101.2 66.5,42.675 67.028,42.147 67.25,42.147
  Top Layer w0.6: U2.3 68.1,47.36 68.1,42.997 67.25,42.147 67.25,40.396 66.75,39.896 R20.2
NetR48_2: R48.2 R52.2 U3.2 | length 29
  Top Layer w0.254: 105.325,102.675 105.5,102.5 ; 106.075,105.925 106.15,106
  Top Layer w0.3: U3.2 88.04,100.29 88.55,100.8 ; 105.5,102.5 R52.2 ; 106.15,106 R48.2
  Top Layer w0.6: U3.2 U3.2@88.09,99.262 ; 88.55,100.8 105.325,100.8 105.325,102.675 105.325,105.175 106.075,105.925 ; R52.2@107.96,102.41 R52.2
NetR49_2: R49.2 R53.2 U3.1 | length 25.2
  Top Layer w0.254: R49.2@108.025,97.9 108.025,98 R49.2 ; R53.2 R53.2@108.05,94.605
  Top Layer w0.3: 104.4,98 R49.2@108.025,98 ; 106.825,94.5 R53.2
  Top Layer w0.6: U3.1 100.288,99.212 101.5,98 104.4,98 104.4,96.925 106.825,94.5
NetR50_2: R50.2 R54.2 U3.14 | length 26
  Top Layer w0.254: R54.2 106.9,86.5 104.475,88.925 104.475,90.025 104.5,90 R50.2
  Top Layer w0.6: U3.14 100.712,93.788 104.475,90.025
NetR51_2: R51.2 R55.2 U3.13 | length 32.7
  Top Layer w0.254: 88.04,92.21 U3.13 ; 106.576,81.5 R51.2 108,81.605 R51.2@107.737,81.868 ; 107.85,79.6 108,79.45 R55.2
  Top Layer w0.6: 88.04,92.21 89.25,91 100.6,91 106.576,85.024 106.576,81.5 106.576,80.874 107.85,79.6 ; R55.2@108.05,78 R55.2@108.14,78.09
NetR60_2: R60.2 R64.2 U4.2 | length 41.4
  Top Layer w0.254: 88.775,55.859 88.775,55.875 ; 106.825,73.5 R60.2 ; 108.05,68.05 108.1,68.1 R64.2
  Top Layer w0.3: U4.2 87.74,54.412 87.74,54.84 88.775,55.875
  Top Layer w0.6: 88.775,55.875 92.375,55.875 102,65.5 ; 106.825,73.5 104.625,73.5 102,70.875 102,65.5 ; 108.05,68.05 105.5,65.5 102,65.5
NetR61_2: R61.2 R65.2 U4.1 | length 26.6
  Top Layer w0.3: 105.925,62 107.675,63.75 108,63.75 ; R65.2 108,63.75 ; R61.2 108,63.75
  Top Layer w0.6: U4.1 94.712,54.212 102.5,62 105.925,62
NetR62_2: R62.2 R66.2 U4.14 | length 25.5
  Top Layer w0.254: 106.125,55.95 108,55.95 ; R66.2 108,54.4 108,55.95 ; R62.2 108,55.95
  Top Layer w0.6: U4.14 98.963,48.788 106.125,55.95
NetR63_2: R63.2 R67.2 U4.13 | length 25.9
  Top Layer w0.3: 87.54,47.16 U4.13 ; 106.425,46 R67.2 R63.2
  Top Layer w0.6: 87.54,47.16 88.7,46 106.425,46
NetR68_2: R68.2 U3.4 | length 12.2
  Top Layer w0.254: 85.45,100.769 85.5,100.719
  Top Layer w0.3: U3.4 85.5,100.719
  Top Layer w0.6: v1@85.1,101.119 v1(85.1,101.3)
  Bottom Layer w0.6: v1(85.1,101.3) 90.6,106.8 R68.2
NetR69_2: R69.2 U3.6 | length 8.1
  Top Layer w0.3: U3.6 82.96,101.775
  Top Layer w0.6: 82.96,101.775 82.96,105.624 R69.2
NetR70_2: R70.2 U3.8 | length 5.8
  Top Layer w0.254: U3.8 81.695,93.783 81.695,91.605 ; 81.7,91.6 81.695,91.605 ; R70.2 81.695,90.505 81.695,91.605
NetR71_2: R71.2 U3.10 | length 12.9
  Top Layer w0.254: U3.10 84.357,93.661 84.357,92.793 85.274,91.876 85.561,91.589
  Top Layer w0.6: 85.274,91.876 85.561,91.589 88.35,88.8 R71.2
NetR72_2: R72.2 U4.8 | length 5.1
  Top Layer w0.3: 81.19,47.11 U4.8
  Top Layer w0.6: 81.19,47.11 81.19,46.206 R72.2
NetR73_2: R73.2 U4.10 | length 12.2
  Top Layer w0.254: 83.725,47.3 83.73,47.305
  Top Layer w0.3: 83.73,47.305 U4.10
  Top Layer w0.6: U4.10 U4.10@83.78,48.738 ; 83.78,47.245 83.78,46.02 85.404,44.396 R73.2
NetR74_2: R74.2 U4.4 | length 14.6
  Top Layer w0.3: U4.4 85,59.9 86.9,61.8 R74.2@93.1,61.8
NetR75_2: R75.2 U4.6 | length 8.7
  Top Layer w0.3: U4.6 82.46,61.486 R75.2
  Top Layer w0.6: U4.6 U4.6@82.51,54.262
NetR102_2: R102.2 R103.2 | length 3.9
  Top Layer w0.254: 52.46,42.635 52.5,42.675
  Top Layer w0.3: 52.5,42.675 R103.2
  Top Layer w0.6: R102.2 52.46,42.635 ; R103.2@52.46,43.76 R103.2
pads on no net: U1.4 U2.5 U2.6 U2.7

## Polygon pours and split planes (outlines as drawn)
GND on Top Layer "GND_L01_P000" (solid, remove dead copper, pour order 0): 36,115.5 131.25,115.5 131.25,36.25 36,36.25
GND on Bottom Layer "GND_L02_P001" (solid, pour order 1): 36.2,115.4 131.3,115.4 131.3,36.3 36.3,36.3

## Keep-outs
Keep-Out Layer:
  lines w0.254: 36.25,36.3 131.25,36.3 131.25,115.3 36.25,115.3 36.25,36.3

## Other copper
Multi-Layer:
  pour cut-out: 125.9,40 ccw(c127.5,40) 127.5,38.4 ccw(c127.5,40) 129.1,40 ccw(c127.5,40) 127.5,41.6 ccw(c127.5,40)
  pour cut-out: 40,110 cw(c40,111.6) 38.4,111.6 cw(c40,111.6) 40,113.2 cw(c40,111.6) 41.6,111.6 cw(c40,111.6)

## Silkscreen, mask and mechanical layers (free items; w line width, h text height)
Top Overlay:
  text "Switch" at 46.946,92.654 h1.52 r90
  text "Battery" at 46.438,79.454 h1.52 r90
  text "Laser" at 46.446,64.554 h1.52 r90
  text "PhotoD" at 46.546,50.754 h1.52 r90
Bottom Overlay:
  text "MAKO 101 2023" at 76.2,80.4 h2
  text "\"Non omnis moriar\"" at 124.2,49 h1.2